# Altium PCB Dc_motor_pcb.PcbDoc
Units mil, origin at the board's own origin, x right, y up, seen from the top; angles counter-clockwise.
Board outline 3543.31 x 1574.8 mil, 2 copper layers (Top Layer, Bottom Layer); 55 components, 44 nets, 229 pads, 112 vias.
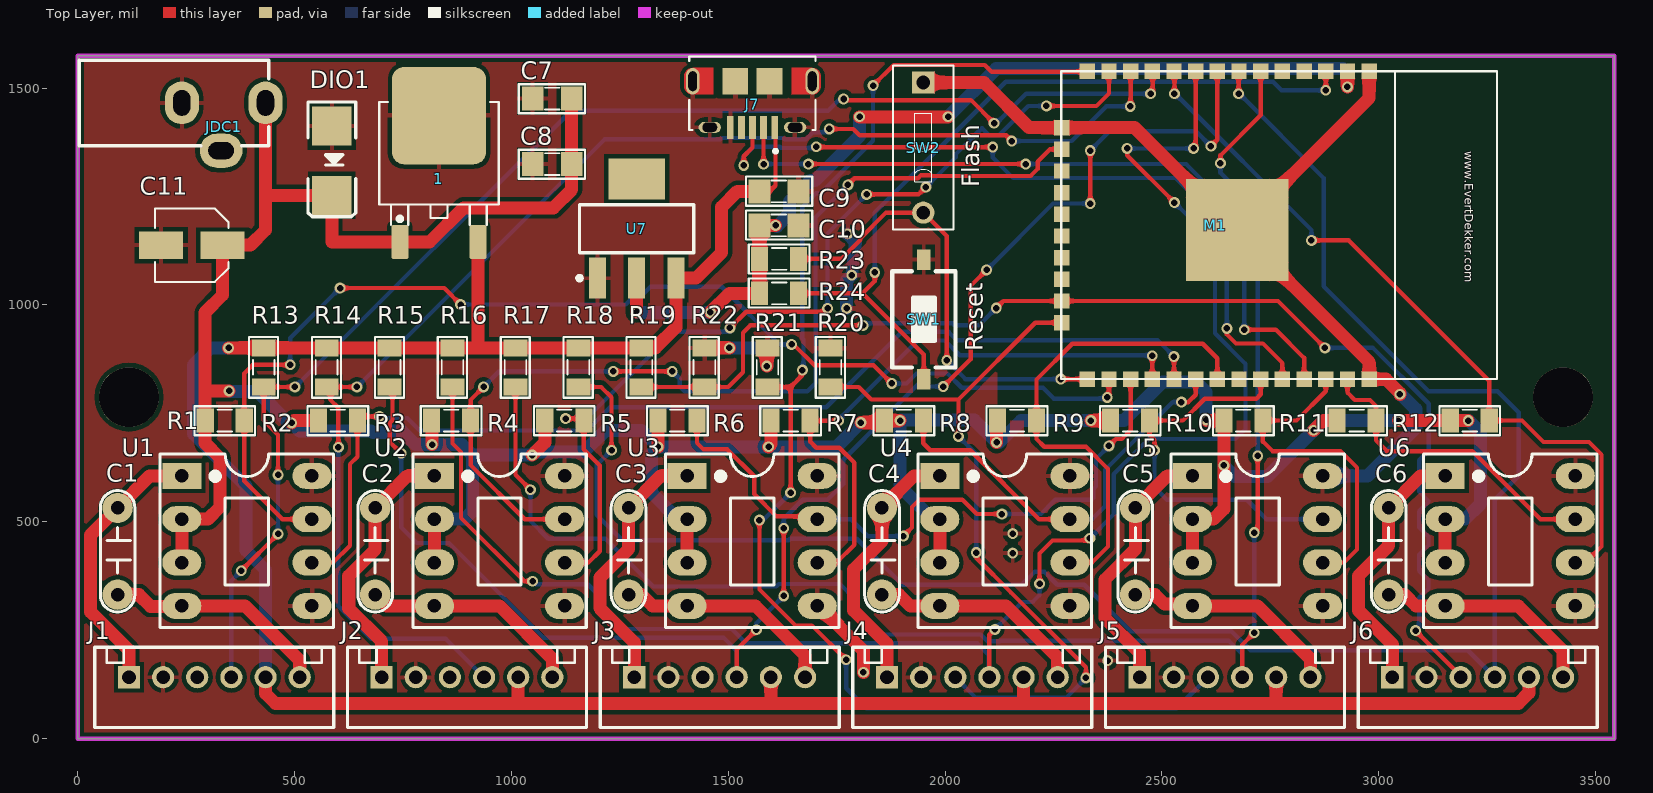
[diagram p0: Top Layer view]
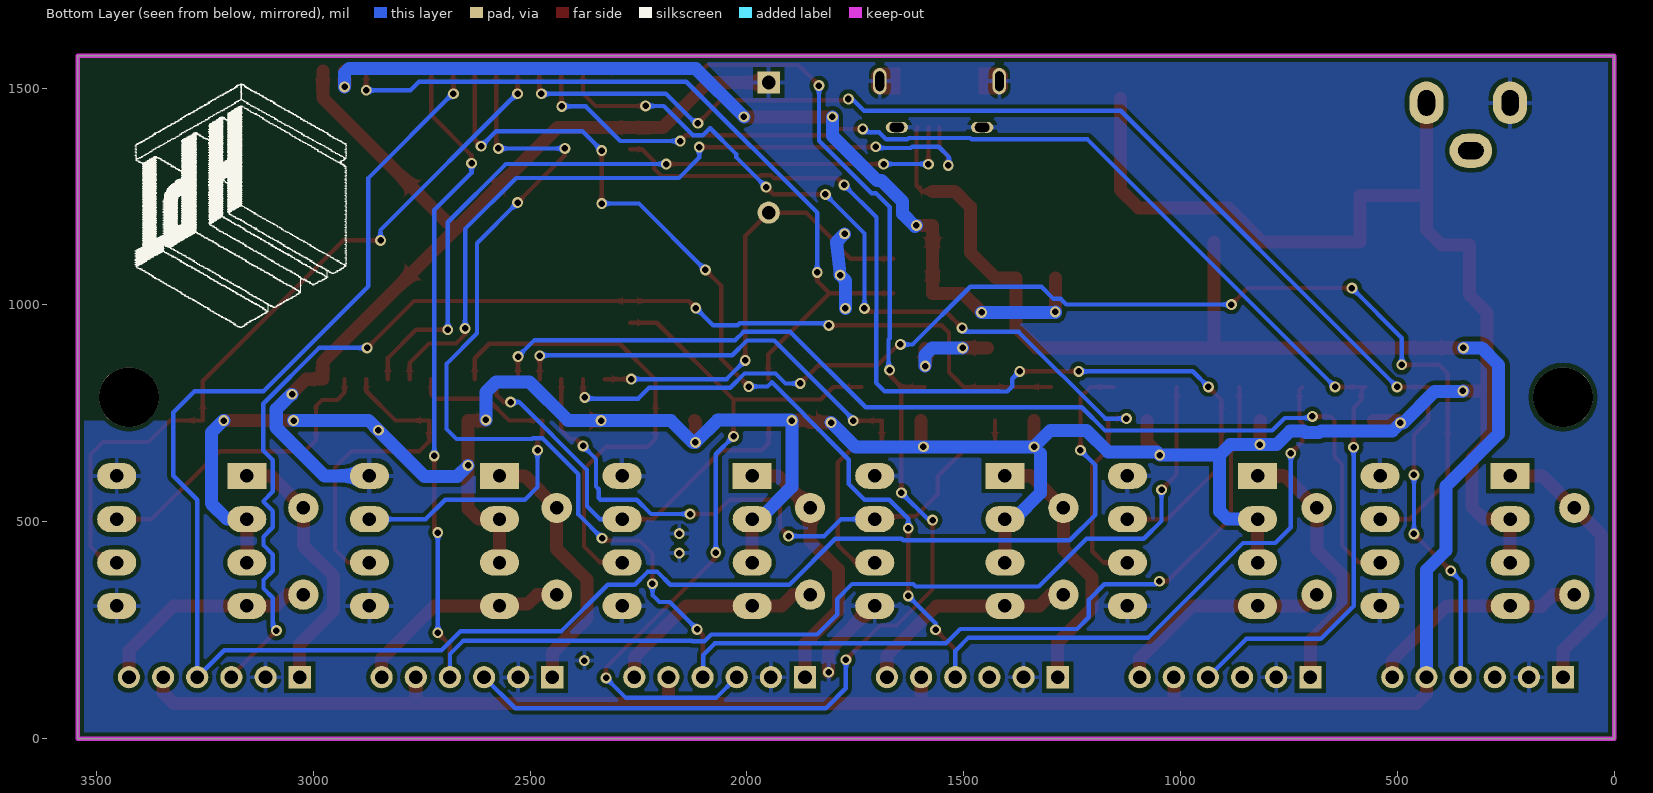
[diagram p1: Bottom Layer view, seen from below]
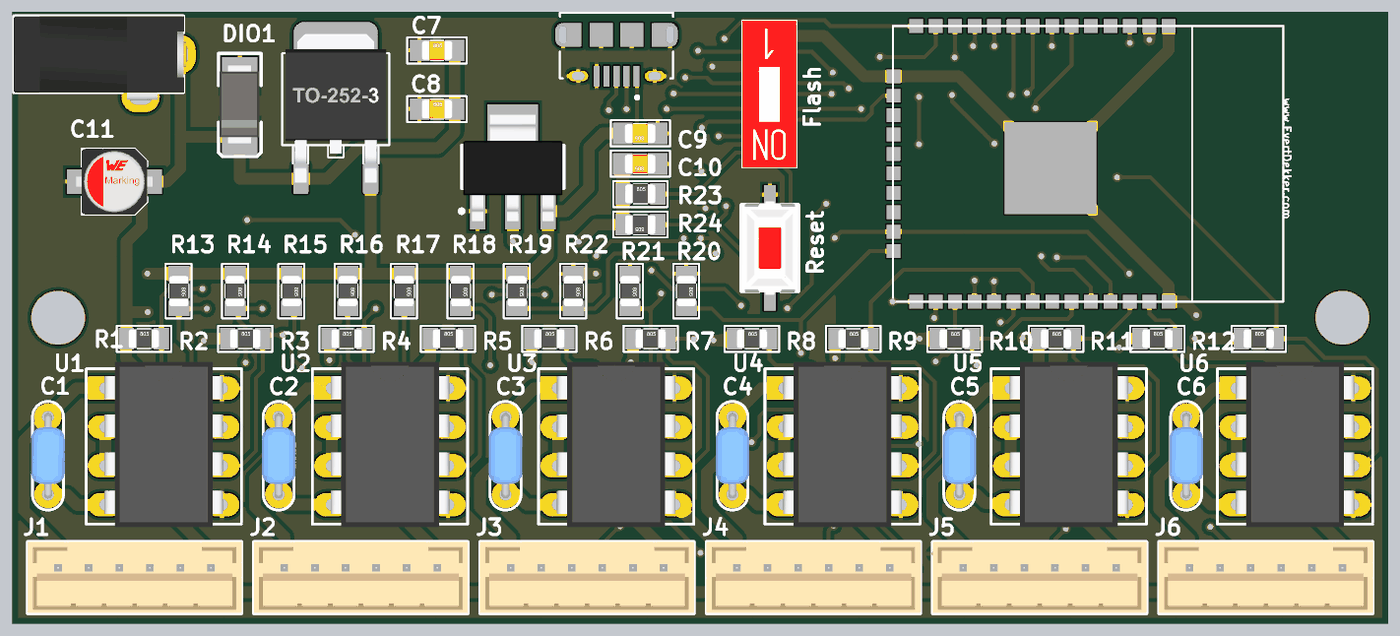
[diagram p2: 3D render of the assembled board from above, using the file's embedded part models]

## Layer stack, top to bottom
Top Solder: solder mask 0.4, Solder Resist, Dk 3.5
Top Layer: signal copper 1.4
Dielectric 1: dielectric 12.6, FR-4, Dk 4.8
Bottom Layer: signal copper 1.4
Bottom Solder: solder mask 0.4, Solder Resist, Dk 3.5

## Board outline
0,0 0,1574.8 3543.31,1574.8 3543.31,0

## Design rules (kind name [scope] priority, off if disabled: settings)
Clearance [All] p1: gap=10
PolygonConnect [All] p1: connectstyle=Relief reliefconductorwidth=10 reliefentries=4 polygonreliefangle="90 Angle" airgapwidth=10
RoomDefinition Power [InComponentClass('Power')] p1: confinementstyle=ConfineIn formatcopy=TRUE lockcomponents=FALSE outline 3870,1955 6300,1955 6300,2545 3870,2545
RoomDefinition MCU [InComponentClass('MCU')] p2: confinementstyle=ConfineIn formatcopy=TRUE lockcomponents=FALSE outline 3870,760 6105,760 6105,1905 3870,1905
RoomDefinition Driver [InComponentClass('Driver')] p3: confinementstyle=ConfineIn formatcopy=TRUE lockcomponents=FALSE outline 3870,40 13920,40 13920,710 3870,710
RoutingVias [All] p1: holewidth=15 width=25 viastyle="Through Hole" minholewidth=15 minwidth=25 maxholewidth=28 maxwidth=50
SolderMaskExpansion [All] p1: expansion=4
Width [All] p1: maxlimit=100 minlimit=10 preferedwidth=10
30 further rules are at their usual default settings.

## Classes and differential pairs
component class Driver: C1 C2 C3 C4 C5 C6 J1 J2 J3 J4 J5 J6 R1 R2 R3 R4 R5 R6 R7 R8 R9 R10 R11 R12 R13 R14 R15 R16 R17 R18 R19 R20 R21 R22 U1 U2 U3 U4 U5 U6
component class MCU: J7 M1 R23 R24 SW1 SW2
component class Power: 1 C7 C8 C9 C10 C11 DIO1 JDC1 U7

## Components (designator, comment, footprint, x,y, rotation, side; value= is the part's Value field where it differs from the comment)
1 "LM78xx" TO252-123 833,1291 r0 top
C1 "XXpF" CN2-LT 97,432 r270 top
C2 "XXpF" CN2-LT 691.04,432 r270 top
C3 "XXpF" CN2-LT 1275.28,432 r270 top
C4 "XXpF" CN2-LT 1859.52,432 r270 top
C5 "XXpF" CN2-LT 2443.76,432 r270 top
C6 "XXpF" CN2-LT 3028,432 r270 top
C7 "104" SM-CAP-0805 1049,1476 r0 top
C8 "104" SM-CAP-0805 1049,1325 r0 top
C9 "104" SM-CAP-0805 1662,1262 r180 top
C10 "104" SM-CAP-0805 1662,1183.67 r180 top
C11 "CN-ALU-SMD" CAP-ALU-SMD-4.5x5x1.4 263,1138 r180 top
DIO1 "Diode SMD" DIO-SMD-106 586,1333 r90 top
J1 "62000611622" 62000611622 314.96,118.11 r180 top
J2 "62000611622" 62000611622 897.64,118.11 r180 top
J3 "62000611622" 62000611622 1480.31,118.11 r180 top
J4 "62000611622" 62000611622 2062.99,118.11 r180 top
J5 "62000611622" 62000611622 2645.67,118.11 r180 top
J6 "62000611622" 62000611622 3228.35,118.11 r180 top
J7 "10118194-0001LF" AMPHENOL_10118194-0001LF 1556,1516 r180 top
JDC1 "Jac DC" DC3 433,1466 r0 top
M1 "ESP32S_Module" ESP32S 2268,1539 r270 top
R1 "10K" RES-SMD-0805 339,733.51 r0 top
R2 "10K" RES-SMD-0805 600,733.51 r0 top
R3 "10K" RES-SMD-0805 861,733.51 r0 top
R4 "10K" RES-SMD-0805 1122,733.51 r0 top
R5 "10K" RES-SMD-0805 1383,733.51 r0 top
R6 "10K" RES-SMD-0805 1644,733.51 r0 top
R7 "10K" RES-SMD-0805 1905,733.51 r0 top
R8 "10K" RES-SMD-0805 2166,733.51 r0 top
R9 "10K" RES-SMD-0805 2427,733.51 r0 top
R10 "10K" RES-SMD-0805 2688,733.51 r0 top
R11 "10K" RES-SMD-0805 2949,733.51 r0 top
R12 "10K" RES-SMD-0805 3210,733.51 r0 top
R13 "10K" RES-SMD-0805 429,856 r270 top
R14 "10K" RES-SMD-0805 574.11,856 r270 top
R15 "10K" RES-SMD-0805 719.22,856 r270 top
R16 "10K" RES-SMD-0805 864.33,856 r270 top
R17 "10K" RES-SMD-0805 1009.44,856 r270 top
R18 "10K" RES-SMD-0805 1154.56,856 r270 top
R19 "10K" RES-SMD-0805 1299.67,856 r270 top
R20 "10K" RES-SMD-0805 1736,856 r270 top
R21 "10K" RES-SMD-0805 1590.55,856 r270 top
R22 "10K" RES-SMD-0805 1445.11,856 r270 top
R23 "10K" RES-SMD-0805 1617.5,1106.33 r0 top
R24 "10K" RES-SMD-0805 1617.5,1027 r180 top
SW1 "Reset" SW1-SMD 1951,967 r90 top
SW2 "Flash" SW-DIP1-1 1950,1363 r180 top
U1 "L9110" DIP8 389.99,461 r270 top
U2 "L9110" DIP8 972.67,461 r270 top
U3 "L9110" DIP8 1555.34,461 r270 top
U4 "L9110" DIP8 2138.02,461 r270 top
U5 "L9110" DIP8 2720.7,461 r270 top
U6 "L9110" DIP8 3303.37,461 r270 top
U7 "LM1117-3.3V" SOT223 1289,1176 r0 top

## Footprints (in the part's own frame and the unit in brackets; to place one, negate y for a bottom-side part, rotate by r counter-clockwise, add the part's x,y. Pads: shape width x height; smd on the part's side, far side on the other; paste and mask are expansions set on the pad)
62000611622 [mm] "2.00mm Male Vertical Shrouded Header, 6p"
  rect 1.3x1.3 hole 0.8: 1(5,-0.6)
  round 1.3 hole 0.8: 2(3,-0.6) 3(1,-0.6) 4(-1,-0.6) 5(-3,-0.6) 6(-5,-0.6)
  silkscreen extent -7,-2.35 7,2.35, body extent -7,-2.35 7,2.3, height 6.12
AMPHENOL_10118194-0001LF [mm]
  rect 0.4x1.35 smd: 1(-1.3,2.7) 2(-0.65,2.7) 3(0,2.7) 4(0.65,2.7) 5(1.3,2.7)
  oval 1.3x0.65 hole 0.55 slot 0.85 at 0 deg: S1(-2.5,2.7) S2(2.5,2.7)
  oval 0.775x1.55 hole 0.5 slot 1.15 at 90 deg: S3(-3.5,0) S6(3.5,0)
  rect 1.5x1.55 smd: S4(-1,0) S5(1,0)
  Top Layer region: 193 vertices and 0 holes, not listed, extent -4,-0.775 -2.3,0.78
  Top Layer region: 193 vertices and 0 holes, not listed, extent 2.3,-0.78 4,0.775
  silkscreen extent -3.7,-1.45 3.7,4.2
CAP-ALU-SMD-4.5x5x1.4 [mm]
  rect 2.6x1.6 smd: 1(-1.8,0) 2(1.8,0)
  silkscreen extent -2.15,-2.15 2.15,2.15, body extent -2.5,-2.15 2.5,2.15, height 5.45
CN2-LT [mil]
  round 70 hole 31: 1(-100,-5) 2(100,-5)
  silkscreen extent -140,-45 140,35, body extent -110,-48 110,39, height 276
DC3 [mm] "WR-DC_DC Power Jack_Right Angled_THT Center Pin ?1.0_Plug ID ?1.05_Plug OD ?3.5"
  oval 2x2.5 hole 1 slot 1.5 at 90 deg: 1(0,0) 2(-4.9,0)
  oval 2.5x2 hole 1 slot 1.5 at 0 deg: 3(-2.6,-2.8)
  silkscreen extent -10.9,-2.5 0.2,2.5, body extent -10.9,-3 0.4,2.5, height 7.81
DIO-SMD-106 [mil]
  rect 90x90.55 smd: 1(80,0) 2(-80,0)
  silkscreen extent -130,-55 135,55, body extent -99,-50 106,52, height 95
DIP8 [mil] "DIP, 8-Leads, Row Spacing 7.62mm, Pitch 2.54mm, Body 9.91x6.73mm"
  rect 60x90 hole 31: 1(-145,-150)
  oval 60x90 hole 31: 2(-45,-150) 3(55,-150) 4(155,-150) 5(155,150) 6(55,150) 7(-45,150) 8(-145,150)
  silkscreen extent -195,-200 205,200, body extent -213,-153 213,153, height 177
ESP32S [mm] "ESP32S-Module"
  rect 0.9x0.9 smd: 1(0,18.034) 2(0,16.764) 3(0,15.494) 4(0,14.224) 5(0,12.954) 6(0,11.684) 7(0,10.414) 8(0,9.144) 9(0,7.874) 10(0,6.604) 11(0,5.334) 12(0,4.064) 13(0,2.794) 14(0,1.524) 15(3.3,0.034) 16(4.57,0.034) 17(5.84,0.034) 18(7.11,0.034) 19(8.38,0.034) 20(9.65,0.034) 21(10.92,0.034) 22(12.19,0.034) 23(13.46,0.034) 24(14.73,0.034) 25(18.034,1.524) 26(18.034,2.794) 27(18.034,4.064) 28(18.034,5.334) 29(18.034,6.604) 30(18.034,7.874) 31(18.034,9.144) 32(18.034,10.414) 33(18.034,11.684) 34(18.034,12.954) 35(18.034,14.224) 36(18.034,15.494) 37(18.034,16.764) 38(18.034,18.034)
  rect 6x6 smd: 101(9.3,10.3)
  silkscreen extent 0,0 18.03,25.53, body extent 0,0 18.03,25.53, height 2
RES-SMD-0805 [mil]
  rect 39.37x55 smd: 1(-45,0) 2(45,0)
  silkscreen extent -70,-34 70,33, body extent -39,-25 39,25, height 31
SM-CAP-0805 [mil]
  rect 50x55 smd: 1(0,0) 2(90,0)
  silkscreen extent -32,-34 121,33, body extent 6,-25 84,25, height 31
SOT223 [mm]
  rect 1x2.4 smd: 1(-2.3,-2.9) 2(0,-2.9) 3(2.3,-2.9)
  rect 3.3x2.4 smd: 4(0,2.9)
  silkscreen extent -3.47,-3.02 3.35,1.4, body extent -3.25,-3.56 3.25,3.4, height 1.68
SW1-SMD [mm]
  rect 1.2x0.8 smd: 1(-3.5,0) 2(3.5,0)
  silkscreen extent -2.82,-1.85 2.82,1.85, body extent -3.05,-1.85 3.05,1.85, height 2.5
SW-DIP1-1 [mm] "01p, 2.54mm Pitch, Horizontal, Box Type, THT, flat Actuator, red, without Tape, Tube"
  rect 1.3x1.3 hole 0.8: 1(0,-3.81)
  round 1.3 hole 0.8: 2(0,3.81)
  silkscreen extent -1.77,-4.8 1.77,4.8, body extent -1.77,-4.8 1.77,4.8, height 5.4
TO252-123 [mm]
  round 0.5 on Mech15: 0(0,0)
  rrect25% 1x2 smd: 1(-2.285,-3.7) 3(2.285,-3.7)
  rrect25% 5.5x5.7 smd: 2(0,3.7)
  silkscreen extent -3.5,-2.7 3.5,4.5, body extent -3.3,-3.95 3.3,5.76, height 2.31

## Part data
1: "Positive Voltage Regulator"
C1 C2 C3 C4 C5 C6 C7 C8 C9 C10: library part CN
C11: "Polarized Capacitor (Axial)"
DIO1: "Default Diode"
J1 J2 J3 J4 J5 J6: "WR-WTB 2.00mm Male Vertical Shrouded Header, 6p"
J7: "USB - micro B USB 2.0 Receptacle Connector 5 Position Surface Mount, Right Angle; Through Hole"
JDC1: library part DCIN, "Jac DC input"
M1: "Esp-32S"
R1 R2 R3 R4 R5 R6 R7 R8 R9 R10 R11 R12 R13 R14 R15 R16 R17 R18 R19 R20 R21 R22 R23 R24: library part Res-SMD, "Resistor"
SW1 SW2: library part SW2, "Switch button 2 pin"
U1 U2 U3 U4 U5 U6: "Half-Bridge Driver"
U7: library part LM1117, "800mA Low-Dropout Linear Regulator"

## Free pads (board coordinates)
  round 137.8 hole 137.8: 2(118.11,787.4) 2(3425.2,787.4)
  round 25 hole 15: 3(1775,1164) 4(1785,1069) 5(1773,992) 6(2375,180) 7(2156,473) 8(2156,428)

## Via types
v1: diameter 25, hole 15, Top Layer to Bottom Layer, tented both sides, 112 vias

## Nets (pads, with @x,y where several pads share a name; then routed paths per layer and width w, separated by ;. In a path a pad name is that pad's centre, name@x,y a point inside that pad or via, vN(x,y) a via of type N, cw(c..) or ccw(c..) an arc to the next point about the centre after c; other vN are vias at no path point)
3.3V: C10.2 M1.2 R23.1 R24.2 U7.2 | length 2160.3
  Top Layer w30: v1(1289,984) U7.2 ; v1(1459,983) 1503,1027 R24.2 ; R24.2@1572,1027.5 C10.2 v1(1609.33,1183.67) ; v1(1803,1434) v1(2007,1434) ; v1(2928,1503) M1.2
  Bottom Layer w30: v1(1289,984) 1288,983 v1(1459,983) ; v1(1609.33,1183.67) 1612,1181 1641,1210 1641,1238.43 1690.07,1287.5 1700.53,1287.5 1803,1389.97 v1(1803,1434) ; v1(2007,1434) 2117.8,1544.8 2918,1544.8 2928,1534.8 v1(2928,1503)
5V: 1.3 C9.2 J1.5 J2.5 J3.5 J4.5 J5.5 J6.5 J7.1 R13.1 R14.1 R15.1 R16.1 R17.1 R18.1 R19.1 U7.3 | length 6059.7
  Top Layer w10: C9.2 1596,1262 1609.09,1275.09 1609.09,1407.79 J7.1
  Top Layer w30: v1(348,901) R13.1 R14.1 R15.1 R16.1 925,901 ; J1.5 433.07,103.93 456,81 1596,81 ; 1.3 922.96,903.04 925,901 ; 1015.75,84.75 J2.5 ; C9.2 1521,1262 1485,1226 1485,1121 1425.83,1061.83 U7.3 1379.55,948.55 1332,901 R19.1 R18.1 R17.1 925,901 ; J3.5 1598.43,83.42 1596,81 ; J4.5 2181.1,81.9 2182,81 ; J5.5 2763.78,84.22 2767,81 ; J6.5 3346.46,105.46 3322,81 2767,81 ; 1596,81 2182,81 ; 2182,81 2767,81
  Bottom Layer w30: v1(348,901) 306,901 267,862 267,703 388,582 388,434 433.07,388.93 J1.5
12V: 1.1 C7.2 C8.2 C11.1 DIO1.2 JDC1.1 R1.1 R2.1 R3.1 R4.1 R5.1 R6.1 R7.1 R8.1 R9.1 R10.1 R11.1 R12.1 U1.2 U1.3 U2.2 U2.3 U3.2 U3.3 U4.2 U4.3 U5.2 U5.3 U6.2 U6.3 | length 7854.6
  Top Layer w30: U1.3 U1.2 300,506 328,534 328,647 293,682 293,732.51 R1.1 294,802 ; v1(349,802) 294,802 ; JDC1.1 433,1253 ; v1(493,728) 498.51,733.51 R2.1 ; R3.1 817,732.5 v1(817,678) ; U2.3 U2.2 ; v1(1048,654) 1077,683 R4.1 ; C7.2 C8.2 1139,1266 1097,1224 890,1224 811.33,1145.33 1.1 586,1145.33 DIO1.2 433,1253 ; v1(1338,673) R5.1 ; U3.3 U3.2 ; v1(1593,673) 1599,679 R6.1 ; v1(1806,729) 1855.49,729 R7.1 v1(1896.51,733.51) ; U4.3 U4.2 ; v1(2119,683) 2119,731.51 R8.1 ; v1(2336.51,733.51) R9.1 ; U5.3 U5.2 2619,506 2643,530 v1(2643,630) R10.1 2603.49,733.51 v1(2602,735) ; v1(2850,711) 2872.51,733.51 R11.1 ; v1(3045.49,733.51) R12.1 v1(3206.51,733.51) ; U6.3 U6.2 ; 294,802 294,983 333.87,1022.87 C11.1 398,1138 433,1173 433,1253
  Bottom Layer w30: v1(349,802) 350,801 414,801 487,728 v1(493,728) 511.5,709.5 676.47,709.5 680.47,705.5 711.53,705.5 715.53,709.5 747.53,709.5 779.03,678 v1(817,678) 886,678 910,654 ; U2.2 892,506 910,524 910,654 ; 1323,658 1323,567 1384,506 U3.2 ; v1(1806,729) 1750,673 v1(1593,673) v1(1338,673) 1300,711 1217.28,711 1167.28,661 1055,661 v1(1048,654) 910,654 ; U4.2 1971,506 1896.51,580.49 v1(1896.51,733.51) 1897.5,734.5 2067.5,734.5 v1(2119,683) 2125,683 2175.51,733.51 v1(2336.51,733.51) 2412.51,733.51 2501,822 2579,822 2602,799 v1(2602,735) ; v1(2643,630) 2668,605 2744,605 v1(2850,711) 2872.51,733.51 v1(3045.49,733.51) ; U6.2 3199,506 3235,542 3235,706 3207,734 v1(3206.51,733.51)
D1+: C1.2 J1.6 U1.4 | length 522
  Top Layer w30: C1.2 141,332 168,305 238.99,305 U1.4 386,306 511.81,180.19 J1.6
D1-: C1.1 J1.1 U1.1 | length 631.1
  Top Layer w30: J1.1 118.11,203.89 30,292 30,470 C1.1 166,606 U1.1
D2+: C2.2 J2.6 U2.4 | length 512.3
  Top Layer w30: C2.2 712.04,306 U2.4 973,306 1094.49,184.51 J2.6
D2-: C2.1 J2.1 U2.1 | length 614.2
  Top Layer w30: J2.1 700.79,224.21 625,300 625,375 686.04,436.04 C2.1 760.04,606 U2.1
D3+: C3.2 J3.6 U3.4 | length 515.1
  Top Layer w30: C3.2 1300,332 1326,306 U3.4 1563.03,306 1677.17,191.87 J3.6
D3-: C3.1 J3.1 U3.1 | length 616.4
  Top Layer w30: J3.1 1283.46,221.54 1204,301 1204,371 1270.28,437.28 C3.1 1344.28,606 U3.1
D4+: C4.2 J4.6 U4.4 | length 510.7
  Top Layer w30: C4.2 1894,332 1920,306 U4.4 2141,306 2259.84,187.16 J4.6
D4-: C4.1 J4.1 U4.1 | length 613.5
  Top Layer w30: J4.1 1866.14,218.86 1789,296 1789,390 1854.52,455.52 C4.1 1928.52,606 U4.1
D5+: C5.2 J5.6 U5.4 | length 507.6
  Top Layer w30: C5.2 2484,332 2506,310 2566.7,310 U5.4 2721,306 2842.52,184.48 J5.6
D5-: C5.1 J5.1 U5.1 | length 614.8
  Top Layer w30: J5.1 2448.82,198.18 2369,278 2369,367 2438.76,436.76 C5.1 2512.76,606 U5.1
D6+: C6.2 J6.6 U6.4 | length 516.8
  Top Layer w30: C6.2 3060,332 3086,306 U6.4 3322,306 3425.2,202.8 J6.6
D6-: C6.1 J6.1 U6.1 | length 612.8
  Top Layer w30: J6.1 3031.5,217.5 2953,296 2953,375 3023,445 C6.1 3097,606 U6.1
ECD1A: J1.4 M1.11 R13.2 | length 3159.2
  Top Layer w10: v1(377,387) v1(462,472) ; v1(462,608) 462,701 429,734 R13.2 v1(501,811) ; v1(1766,1475) 1768.59,1472.41 2059.59,1472.41 v1(2113,1419) ; v1(2474,1487) 2477,1487 2479,1485 2479,1538 M1.11
  Bottom Layer w10: J1.4 354.33,364.33 v1(377,387) ; v1(462,472) v1(462,608) ; v1(501,811) 1138,1448 1730,1448 1757,1475 v1(1766,1475) ; v1(2113,1419) 2119,1419 2187,1487 v1(2474,1487)
ECD1B: J1.3
ECD2A: J2.4 M1.12 R14.2 | length 3148.2
  Top Layer w10: v1(601,672) 601,763 583,781 583,802.11 R14.2 v1(644,811) ; v1(1733,1406) 1788.57,1406 1803.07,1391.5 2140.5,1391.5 v1(2154,1378) ; v1(2427,1458) 2428,1459 M1.12
  Bottom Layer w10: v1(601,672) 601,306 677,230 848.74,230 J2.4 ; v1(644,811) 1214.91,1381.91 1481.88,1381.91 1484.98,1385 1627.02,1385 1630.12,1381.91 1678.73,1381.91 1694.83,1398 1725,1398 v1(1733,1406) ; v1(2154,1378) 2292,1378 2372,1458 v1(2427,1458)
ECD2B: J2.3
ECD3A: J3.4 M1.8 R15.2 | length 3464.6
  Top Layer w10: R15.2 726,804.22 726,734.11 719.22,727.33 719.22,684.78 v1(746,658) ; J3.4 1519.68,205.68 v1(1565,251) ; v1(1628,329) v1(1628,485) ; v1(1996,812) 2059,875 2059,1044 v1(2096,1081) ; v1(2335,1234) v1(2335,1356) ; v1(2613,1366) 2628,1381 M1.8
  Bottom Layer w10: v1(746,658) 746,487 782,451 856.3,451 1074.3,233 1489,233 1519.68,202.32 J3.4 ; v1(1565,251) 1565,266 v1(1628,329) ; v1(1628,485) 1628,507.3 1671.7,551 1728.98,551 1765.34,587.36 1765.34,643.34 1866.51,744.51 1866.51,745.93 1942.57,822 1952.57,812 v1(1996,812) ; v1(2096,1081) 2249,1234 v1(2335,1234) ; v1(2335,1356) 2380,1401 2578,1401 v1(2613,1366)
ECD3B: J3.3
ECD4A: J4.4 M1.9 R16.2 | length 3823.2
  Top Layer w10: R16.2 864.33,680.67 884,661 884,509 1030,363 v1(1049,363) ; J4.4 2102.36,239.36 v1(2115,252) ; v1(2218,357) 2218,427 2248,457 2329,457 v1(2334,462) ; v1(2420,1361) 2420,1345 v1(2529,1236) ; v1(2573,1361) 2578,1366 M1.9
  Bottom Layer w10: v1(1049,363) 1056,356 1176,356 1212,320 1212,280 1239,253 1508,253 1541,220 2074,220 2101,193 2101,143.09 J4.4 ; v1(2115,252) 2178,315 2202,315 2218,331 v1(2218,357) ; v1(2334,462) 2388.76,516.76 2388.76,609.65 2471.61,692.5 2494.39,692.5 2495.89,691 2670,691 2693,714 2693,864.11 2622.5,934.61 2622.5,1142.5 v1(2529,1236) ; v1(2420,1361) v1(2573,1361)
ECD4B: J4.3 M1.24 R20.2 | length 1722.9
  Top Layer w10: R20.2 1801,811 1830,782 2031,782 ; v1(2031,697) 2031,782 ; v1(2072,429) 2072,417 2153,336 2153.43,336 2325,164.43 v1(2325,140) ; M1.24 2208.08,959.08 2031,782
  Bottom Layer w10: J4.3 2071.35,94 2279,94 v1(2325,140) ; v1(2031,697) 2072,656 v1(2072,429)
ECD5A: J5.4 M1.6 R17.2 | length 3658
  Top Layer w10: R17.2 1009.44,608.56 v1(1044,574) ; v1(2635,1327) 2635,1345 2728,1438 M1.6 ; J5.4 2685.04,216.04 v1(2713,244) ; v1(2713,475) 2721,483 v1(2721,652)
  Bottom Layer w10: v1(1044,574) 1044,502 1085,461 1217,461 1327,351 1611.11,351 1616.61,356.5 1757.5,356.5 1792,322 1792,286 1838,240 2082.28,240 2097.78,224.5 2126.39,224.5 2127.89,226 2654,226 2685,195 2685,141.77 J5.4 ; v1(2635,1327) 2635,1305 2721,1219 v1(2721,652) ; v1(2713,244) v1(2713,475)
ECD5B: J5.3 M1.14 R21.2 | length 3074.2
  Top Layer w10: v1(1572,504) 1572,344 1655,261 1693,261 v1(1772,182) ; R21.2 1644,811 ; v1(1644,567) 1644,811 ; v1(1671,850) 1671,838 1644,811 ; v1(1834,1506) 1881.59,1553.59 2091.84,1553.59 2107.43,1538 2327,1538 M1.14
  Bottom Layer w10: v1(1572,504) 1581,504 v1(1644,567) ; v1(1671,850) 1673.5,852.5 1673.5,920.39 1671,922.89 1671,1226 1702.5,1257.5 1712.96,1257.5 1834,1378.54 v1(1834,1506) ; v1(1772,182) 1772,116 1818,70 2534.57,70 J5.3
ECD6A: J6.4 M1.7 R18.2 | length 4405.6
  Top Layer w10: R18.2 1207,811 1231,787 v1(1231,665) ; v1(2677,1487) M1.7@2677,1538
  Bottom Layer w10: v1(1231,665) 1197,631 1197,516 1255.5,457.5 1639.39,457.5 1642.89,461 1796.23,461 1902.23,355 2177.11,355 2206.61,384.5 2229.39,384.5 2258.89,355 2321,355 2428,248 2660.28,248 2704.28,204 3205.45,204 J6.4 3267.72,550.72 3323,606 3323,752 3274,801 3115,801 2873,1043 2873,1293 2679,1487 v1(2677,1487)
ECD6B: J6.3 M1.23 R19.2 R22.2 | length 2793.4
  Top Layer w10: R19.2 R22.2 1500,811 1534,845 1534,936 1551,953 v1(1811,953) ; v1(2118,993) 2134.08,1009.08 M1.23 2767.92,1009.08 v1(2876,901) ; v1(3085,249) 3188.98,145.02 J6.3
  Bottom Layer w10: v1(1811,953) 1816,958 2016.57,958 2021.57,953 2078,953 v1(2118,993) ; v1(2876,901) 2986.72,901 3115.49,772.22 3115.49,664.33 3093.37,642.21 3093.37,569.79 3115,548.16 3115,546.27 3093.37,524.64 3093.37,487.36 3115,465.73 3115,446.27 3093.37,424.64 3093.37,387.36 3115,365.73 3115,346.27 3093.37,324.64 3093.37,257.37 v1(3085,249)
GND: 1.2 C7.1 C8.1 C9.1 C10.1 C11.2 DIO1.1 J1.2 J2.2 J3.2 J4.2 J5.2 J6.2 J7.5 J7.S1 J7.S2 J7.S3 J7.S4 J7.S5 J7.S6 JDC1.2 M1.1 M1.15 M1.38 M1.101 pad.3 pad.4 pad.5 pad.6 pad.7 pad.8 R20.1 R21.1 R22.1 SW1.2 SW2.1 U1.5 U1.8 U2.5 U2.8 U3.5 U3.8 U4.5 U4.8 U5.5 U5.8 U6.5 U6.8 U7.1 | length 2869.8
  Top Layer w30: R22.1 v1(1503,901) ; v1(1589,859) R21.1@1589,899.45 ; U3.5 1709,306 1812,203 v1(1812,153) ; SW2.1 2090,1513 2193.92,1409.08 M1.15 2437.29,1409.08 M1.101 ; M1.1 2978,1477.35 M1.101 ; v1(3049,794) 3049,797 3017,829 M1.38 2978,868.37 M1.101
  Bottom Layer w30: v1(1503,901) 1573,901 1589,885 v1(1589,859) ; pad.5 1773,1057 pad.4 1794,1145 pad.3 ; U5.8 2974.56,606 3085.49,716.94 3085.49,759.8 3051.29,794 v1(3049,794)
L1DOWN: M1.29 R2.2 U1.6 | length 2480
  Top Layer w10: U1.6 589,406 628,445 628,633 645,650 R2.2 654.49,743 v1(696,743) ; M1.29 v1(2528,881)
  Bottom Layer w10: v1(696,743) 691,743 694.5,739.5 759.96,739.5 788.96,710.5 1174.36,710.5 1227.86,764 1726,764 1900,938 2008.28,938 2027.28,919 2490,919 v1(2528,881)
L1UP: M1.26 R1.2 U1.7 | length 2751.9
  Top Layer w10: v1(490,862) 404,862 384,842 R1.2 384,594 472,506 U1.7 ; v1(605,1039) 845,1039 v1(883,1001) ; v1(1646,909) 1650.89,909 1698.89,861 1835,861 v1(1877,819) ; v1(2374,787) 2378,791 M1.26
  Bottom Layer w10: v1(490,862) 490,924 v1(605,1039) ; v1(883,1001) 1263.57,1001 1276.57,1014 1293,1014 1321,1042 1485,1042 1618,909 v1(1646,909) ; v1(1877,819) 1911.29,819 1934.29,842 2005.72,842 2038.72,809 2226,809 2251,784 2371,784 v1(2374,787)
L2DOWN: M1.13 R4.2 U2.6 | length 2191.5
  Top Layer w10: U2.6 1178,406 1204,432 1204,630 1167,667 R4.2 1162.5,738 v1(1125,738) ; v1(1504,947) 1541.5,984.5 1721.5,984.5 v1(1729,992) ; v1(1819,1255) 1939,1255 v1(1956,1272) ; v1(2234,1459) 2349,1459 2378,1488 M1.13
  Bottom Layer w10: v1(1125,738) 1173.57,738 1373.57,938 1504,938 v1(1504,947) ; v1(1729,992) 1729,1165 v1(1819,1255) ; v1(1956,1272) 2025,1341 2025,1348 2084.61,1407.61 2085.5,1407.61 2101.61,1391.5 2124.39,1391.5 2191.89,1459 v1(2234,1459)
L2UP: M1.16 R3.2 U2.7 | length 2306.4
  Top Layer w10: v1(936,811) 906,781 R3.2 906,631 1031,506 U2.7 ; v1(1235,847) v1(1371,847) ; v1(1776,1277) 1791,1292 1937.11,1292 1944.61,1299.5 1967.39,1299.5 1969.39,1297.5 2197.39,1297.5 2213.5,1313.61 2213.5,1330.5 2242.08,1359.08 M1.16
  Bottom Layer w10: v1(936,811) 972,847 v1(1235,847) ; v1(1371,847) 1388.07,829.93 1388.07,812.07 1399.79,800.36 1416.36,800.36 1417,801 1682.64,801 1702,820.36 1702,980.11 1701.5,980.61 1701.5,1202.5 v1(1776,1277)
L3DOWN: M1.28 R6.2 U3.6 | length 1400.5
  Top Layer w10: U3.6 1750,406 1791,447 1791,636 1756,671 1703,671 1689,685 R6.2 1689.5,733 v1(1755,733) ; M1.28 v1(2478,883)
  Bottom Layer w10: v1(1755,733) 1755,735.89 1937.11,918 2000,918 2034,884 2479,884 v1(2478,883)
L3UP: M1.27 R5.2 U3.7 | length 1487.7
  Top Layer w10: R5.2 1428,682 1443,667 1498,667 1560,605 1560,564 1611.5,512.5 1698.84,512.5 U3.7 ; v1(1904,467) 1924,487 1924,534 1941,551 2040,551 2073,518 v1(2131,518) ; v1(2378,675) 2394.01,691.01 2407.9,691.01 2428,711.11 M1.27
  Bottom Layer w10: U3.7 1783,506 1822,467 v1(1904,467) ; v1(2131,518) 2221.38,518 2254.38,551 2338,551 2342,555 2342,575.32 2348.02,581.34 2348.02,645.02 v1(2378,675)
L4DOWN: M1.31 R8.2 U4.6 | length 1125.9
  Top Layer w10: U4.6 2289.02,407 2340,407 2376,443 2376,622 2325,673 2229,673 2211,691 R8.2 2211,828 2293.5,910.5 2594.5,910.5 2628,877 M1.31
L4UP: M1.30 R7.2 U4.7 | length 957.1
  Top Layer w10: R7.2 1950,681 1966,665 2058,665 2217,506 U4.7 ; v1(2545,776) 2561,776 2578,793 M1.30
  Bottom Layer w10: U4.7 2339,506 2368.76,535.76 2368.76,619.76 2525,776 v1(2545,776)
L5DOWN: M1.36 R10.2 U5.6 | length 772
  Top Layer w10: U5.6 2920,406 2950,436 2950,625 2912,663 2755,663 2733,685 R10.2 2810.51,733.51 2878,801 M1.36
L5UP: M1.33 R9.2 U5.7 | length 892.5
  Top Layer w10: v1(2483,665) 2483,689 2472,700 R9.2 2548.51,733.51 2599,784 2718,784 2728,794 M1.33
  Bottom Layer w10: v1(2483,665) 2483,580 2512,551 2696,551 2741,506 U5.7
L6DOWN: M1.10 R12.2 U6.6 | length 1737.6
  Top Layer w10: M1.10 2529,1538 v1(2529,1487) ; v1(2845,1149) 2931,1149 3255,825 R12.2 3330.49,733.51 3380,684 3485,684 3514,655 3514,443 3477,406 U6.6
  Bottom Layer w10: v1(2529,1487) 2530.89,1487 2845,1172.89 v1(2845,1149)
L6UP: M1.37 R11.2 U6.7 | length 723.6
  Top Layer w10: M1.37 2928,798 2945,781 2980,781 2994,767 R11.2 2994,688 3019,663 3216,663 3373,506 U6.7
NetM1_3: M1.3 R24.1 SW1.1 | length 1818.5
  Top Layer w10: R24.1 1810,1027 ; v1(1838,1075) 1838,1055 1810,1027 ; SW1.1 1951,886 1810,1027 ; v1(2878,1495) M1.3
  Bottom Layer w10: v1(1838,1075) 1838,1213 2139.8,1514.8 2756.2,1514.8 2776,1495 v1(2878,1495)
NetM1_25: M1.25 R23.2 SW2.2 | length 1038.9
  Top Layer w10: R23.2 1760.76,1106.33 1805,1150.57 1805,1154 1864,1213 SW2.2 2004,1159 v1(2004,872) ; v1(2267,829) M1.25
  Bottom Layer w10: v1(2004,872) 2047,829 v1(2267,829)
RX: J7.2 M1.35 | length 1711.1
  Top Layer w10: v1(1581.59,1324.59) J7.2 ; v1(1685,1325) v1(2186,1325) ; v1(2690,943) 2763,943 2828,878 M1.35
  Bottom Layer w10: v1(1581.59,1324.59) 1582,1325 v1(1685,1325) ; v1(2186,1325) 2556,1325 2690,1191 v1(2690,943)
TX: J7.3 M1.34 | length 1776.4
  Top Layer w10: v1(1536,1322) 1536,1343 1556,1363 J7.3 ; v1(1703,1365) 1704,1364 v1(2110,1364) ; v1(2650,946) 2650,932 2671,911 2733,911 2778,866 M1.34
  Bottom Layer w10: v1(1536,1322) 1534,1320 1534,1341 1558,1365 1618.74,1365 1621.83,1361.91 1699.91,1361.91 v1(1703,1365) ; v1(2110,1364) 2110,1340 2157,1293 2532,1293 2650,1175 v1(2650,946)
pads on no net: 1.0 J7.4 JDC1.3 M1.4 M1.5 M1.17 M1.18 M1.19 M1.20 M1.21 M1.22 M1.32 U7.4

## Polygon pours and split planes (outlines as drawn)
GND on Top Layer "Top Layer-No Net" (solid, remove dead copper, pour order 0): 0,1574.8 0,0 3543.31,0 3543.31,733.51 2121,733.51 2121,1574.8 2107,1574.8
GND on Bottom Layer "Top Layer-No Net" (solid, remove dead copper, pour order 2): 0,1574.8 0,0 3543.31,0 3543.31,733 2120,733 2120,1574.8 2073,1574.8

## Keep-outs
Keep-Out Layer:
  the board outline again, w10

## Silkscreen, mask and mechanical layers (free items; w line width, h text height)
Bottom Overlay:
  drawing of 2330 lines, arcs and shapes, not listed

## Text inside footprints (layer, text, board x,y; h text height)
J7: Mechanical 13 "PCB END" at 1632.77,1598.68 h19.68 r180
M1: Top Overlay "www.EvertDekker.com" at 3198,1354 h19.68 r270